# Altium PCB IPS.PcbDoc
Units mm, origin at the board's own origin, x right, y up, seen from the top; angles counter-clockwise.
Board outline 84.33 x 66.8 mm, 2 copper layers (F.Cu, B.Cu); 67 components, 39 nets, 171 pads, 0 vias.
Unrouted connection lines stored in the file: 10.
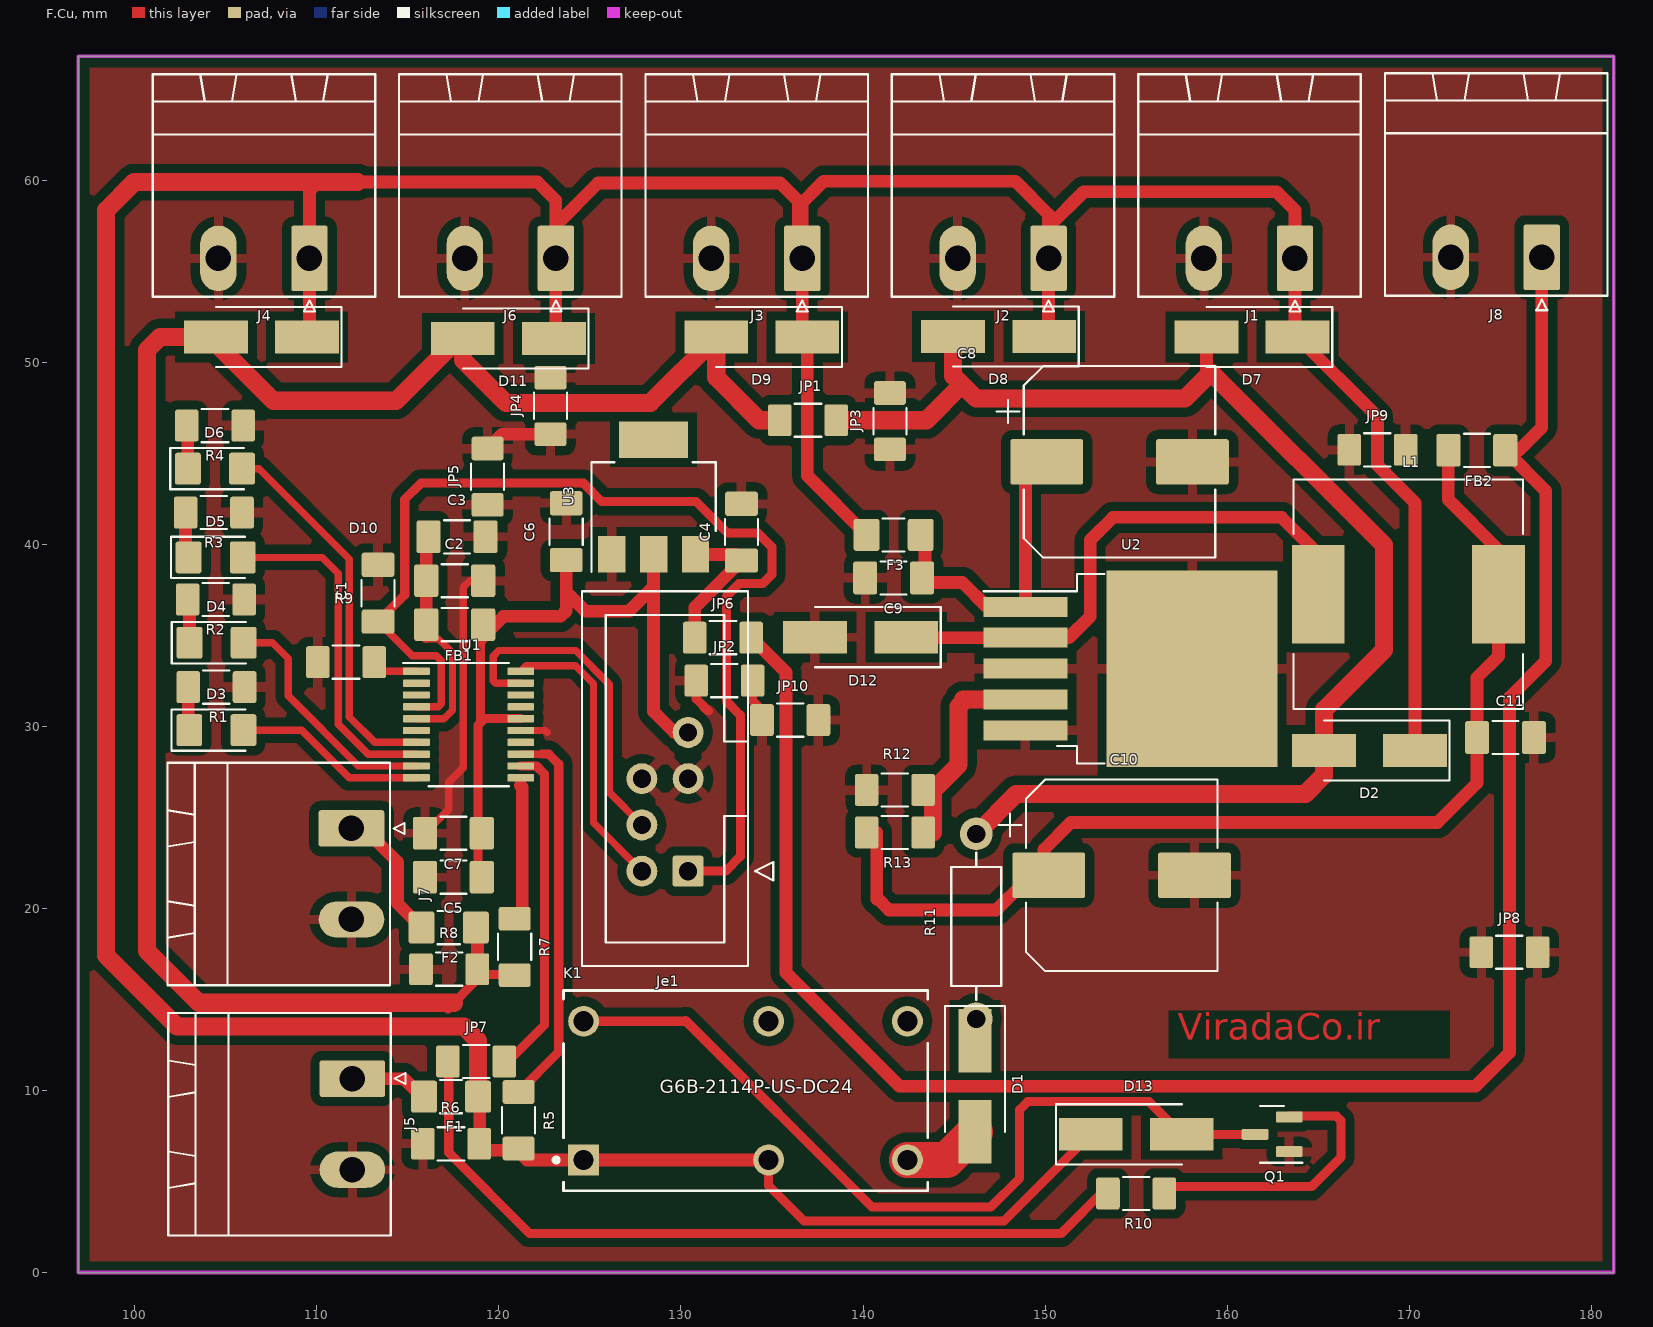
[diagram p0: F.Cu view]
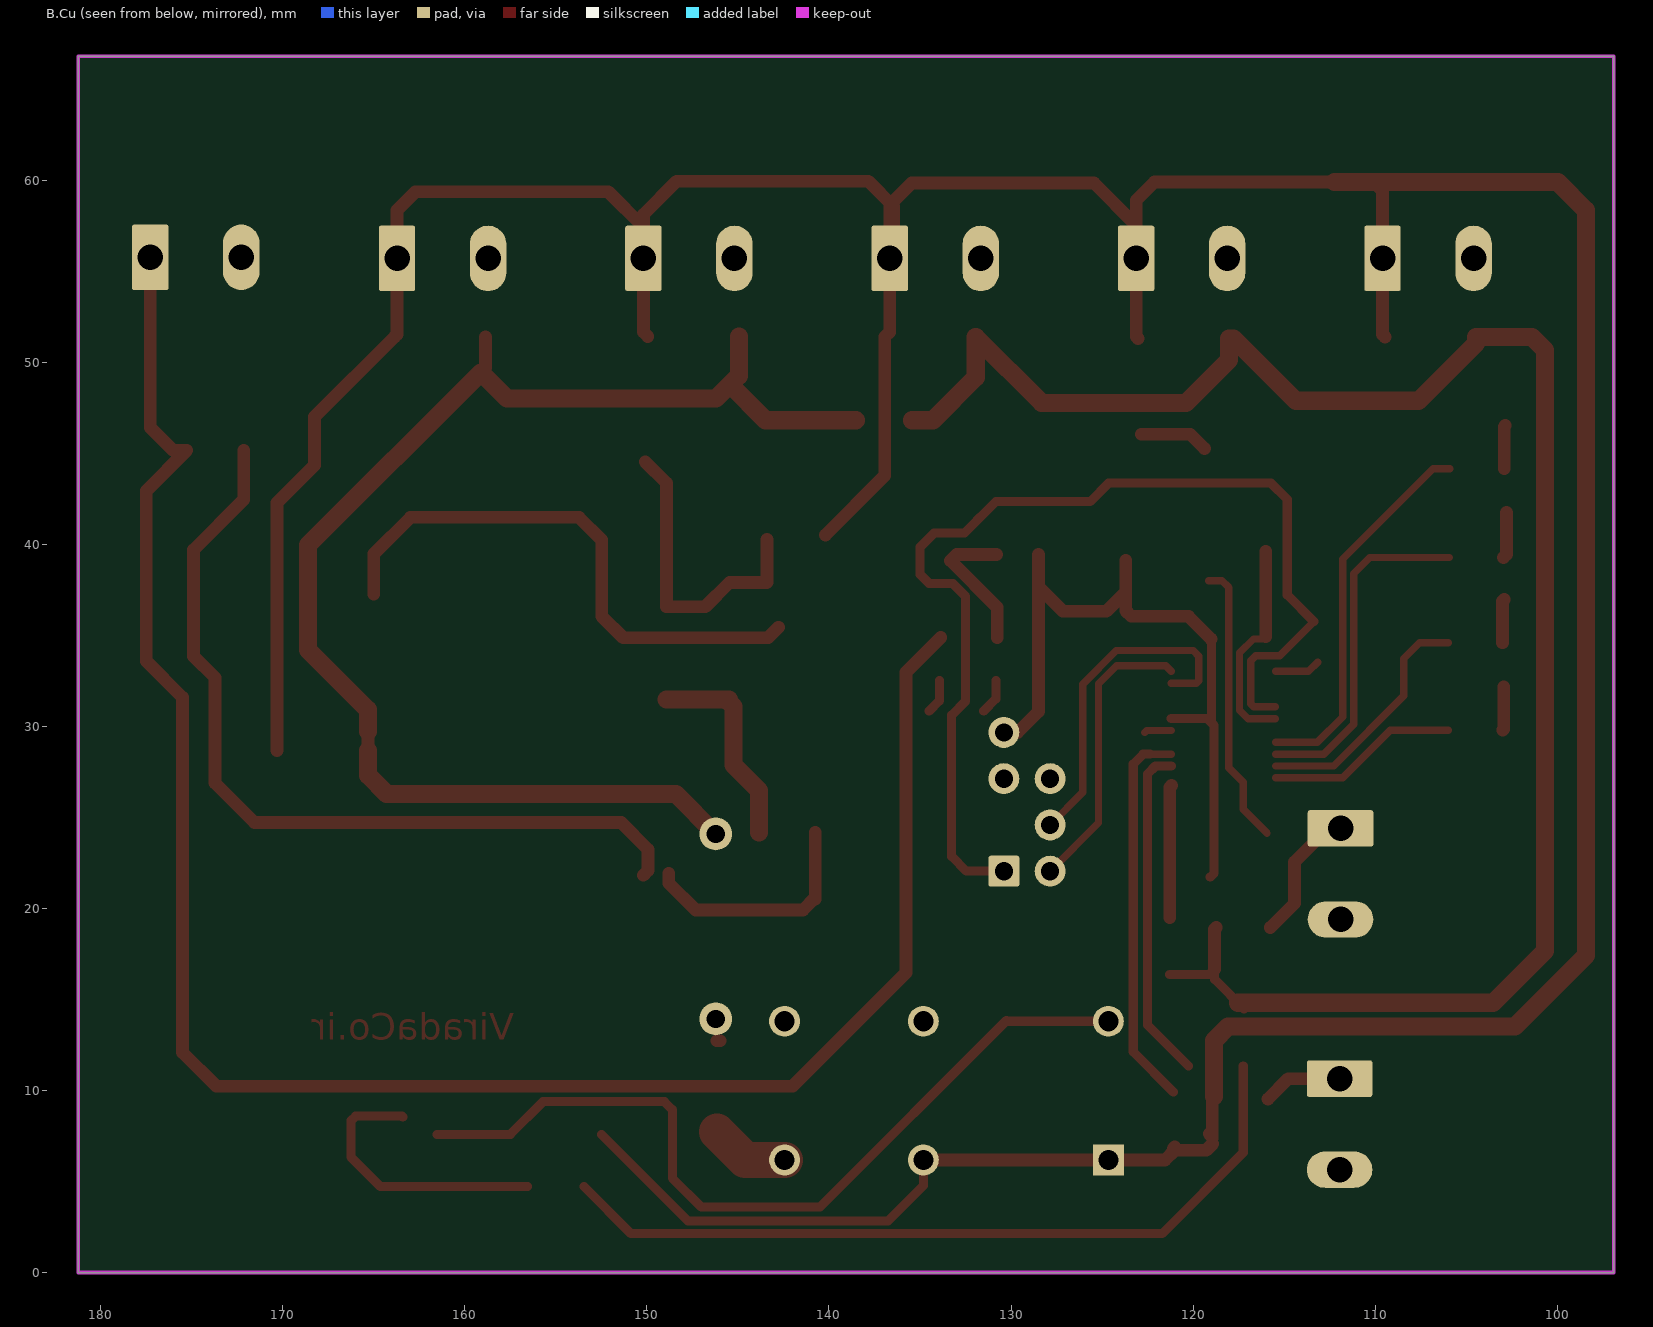
[diagram p1: B.Cu view, seen from below]

## Layer stack, top to bottom
F.Mask: solder mask 0.0102, Solder Resist, Dk 3.5
F.Cu: signal copper 0.0356
Dielectric 1: dielectric 0.32, FR-4, Dk 4.8
B.Cu: signal copper 0.0356
B.Mask: solder mask 0.0102, Solder Resist, Dk 3.5

## Board outline
181.229,66.799 181.229,0 96.901,0 96.901,66.799 181.229,66.799

## Design rules (kind name [scope] priority, off if disabled: settings)
Clearance "Clearence 0.508_Polygon" [InNamedPolygon('F.Cu-GND')] p1: gap=0.508 ignorepadtopadclearanceinfootprint=FALSE
MinimumSolderMaskSliver [All] p1: minsoldermaskwidth=0
PolygonConnect Polygon_F.Cu-GND_ConnectDirect [IsNamedPolygon('F.Cu-GND') vs IsVia] p1: connectstyle=Direct reliefconductorwidth=0.254 reliefentries=4 polygonreliefangle="90 Angle" airgapwidth=0.254
PolygonConnect Polygon_F.Cu-GND_ConnectRelief45 [IsNamedPolygon('F.Cu-GND') vs (IsThruPin or IsSMTPin) and (PadShape_AllLayers = 'Round')] p2: connectstyle=Relief reliefconductorwidth=0.508 reliefentries=4 polygonreliefangle="45 Angle" airgapwidth=0.508
PolygonConnect Polygon_F.Cu-GND_ConnectRelief90 [IsNamedPolygon('F.Cu-GND') vs (IsThruPin or IsSMTPin) and (PadShape_AllLayers <> 'Round')] p3: connectstyle=Relief reliefconductorwidth=0.508 reliefentries=4 polygonreliefangle="90 Angle" airgapwidth=0.508
RoutingVias [All] p1: holewidth=0.711 width=1.27 viastyle="Through Hole" minholewidth=0.711 minwidth=1.27 maxholewidth=0.711 maxwidth=1.27
SilkToSilkClearance [All] p1: silktosilkclearance=0
SilkToSolderMaskClearance [IsPad] p1: minsilkscreentomaskgap=0 clearancetoexposedcopper=TRUE
SolderMaskExpansion [All] p1: expansion=0.102 istentingtop=FALSE
Width [All] p1: maxlimit=10 minlimit=0.254 preferedwidth=0.254 bottomlayer_maxwidth=0.254 minimp=50.000000 maximp=50.000000 favimp=50.000000
27 further rules are at their usual default settings.

## Components (designator, comment, footprint, x,y, rotation, side; value= is the part's Value field where it differs from the comment)
C1 "C_Small" C_1206_3216Metric_Pad1.33x1.80mm_HandSolder 113.36,37.31 r90 top
C2 "C_Small" C_1206_3216Metric_Pad1.33x1.80mm_HandSolder 117.577,37.996 r0 top
C3 "C_Small" C_1206_3216Metric_Pad1.33x1.80mm_HandSolder 117.704,40.409 r0 top
C4 "C_Small" C_1206_3216Metric_Pad1.33x1.80mm_HandSolder 133.325,40.663 r90 top
C5 "C_Small" C_1206_3216Metric_Pad1.33x1.80mm_HandSolder 117.5,21.714 r180 top
C6 "C_Small" C_1206_3216Metric_Pad1.33x1.80mm_HandSolder 123.698,40.688 r90 top
C7 "C_Small" C_1206_3216Metric_Pad1.33x1.80mm_HandSolder 117.5,24.127 r180 top
C8 "CP_Small" CP_Elec_10x10 154.089,44.524 r0 top
C9 "C_Small" C_1206_3216Metric_Pad1.33x1.80mm_HandSolder 141.681,38.148 r180 top
C10 "CP_Small" CP_Elec_10x10 154.203,21.816 r0 top
C11 "C_Small" C_1206_3216Metric_Pad1.33x1.80mm_HandSolder 175.284,29.385 r0 top
D1 "D_Small" D_SMA_Handsoldering 146.152,10.234 r270 top
D2 "D_Small" D_SMA_Handsoldering 167.816,28.674 r180 top
D3 "LED" LED_1206_3216Metric_Pad1.42x1.75mm_HandSolder 104.485,29.792 r0 top
D4 "LED" LED_1206_3216Metric_Pad1.42x1.75mm_HandSolder 104.496,34.592 r0 top
D5 "LED" LED_1206_3216Metric_Pad1.42x1.75mm_HandSolder 104.448,39.277 r0 top
D6 "LED" LED_1206_3216Metric_Pad1.42x1.75mm_HandSolder 104.407,44.153 r0 top
D7 "D_Small" D_SMA_Handsoldering 161.366,51.382 r180 top
D8 "D_Small" D_SMA_Handsoldering 147.447,51.407 r180 top
D9 "D_Small" D_SMA_Handsoldering 134.442,51.382 r180 top
D10 "D_Small" D_SMA_Handsoldering 106.959,51.382 r180 top
D11 "D_Small" D_SMA_Handsoldering 120.523,51.305 r180 top
D12 "D_Small" D_SMA_Handsoldering 139.867,34.897 r180 top
D13 "D_Small" D_SMA_Handsoldering 155,7.592 r0 top
F1 "Fuse_Small" Fuse_1206_3216Metric_Pad1.42x1.75mm_HandSolder 117.373,9.662 r180 top
F2 "Fuse_Small" Fuse_1206_3216Metric_Pad1.42x1.75mm_HandSolder 117.246,18.946 r180 top
F3 "Fuse" Fuse_1206_3216Metric_Pad1.42x1.75mm_HandSolder 141.681,40.51 r180 top
FB1 "FerriteBead_Small" C_1206_3216Metric_Pad1.33x1.80mm_HandSolder 117.577,35.583 r180 top
FB2 "Ferrite_Bead_Small" C_1206_3216Metric_Pad1.33x1.80mm_HandSolder 173.711,45.159 r180 top
J1 "Cam1-12V" PhoenixContact_MSTBA_2,5_2-G_1x02_P5.00mm_Horizontal 163.723,55.7 r180 top
J2 "Cam1-12V" PhoenixContact_MSTBA_2,5_2-G_1x02_P5.00mm_Horizontal 150.192,55.7 r180 top
J3 "Cam1-12V" PhoenixContact_MSTBA_2,5_2-G_1x02_P5.00mm_Horizontal 136.661,55.7 r180 top
J4 "Cam1-12V" PhoenixContact_MSTBA_2,5_2-G_1x02_P5.00mm_Horizontal 109.599,55.7 r180 top
J5 "12VAdaptorIn" PhoenixContact_MSTBA_2,5_2-G_1x02_P5.00mm_Horizontal 111.956,10.651 r270 top
J6 "Cam1-12V" PhoenixContact_MSTBA_2,5_2-G_1x02_P5.00mm_Horizontal 123.13,55.7 r180 top
J7 "12VBatteryIn" PhoenixContact_MSTBA_2,5_2-G_1x02_P5.00mm_Horizontal 111.905,24.392 r270 top
J8 "Modem9V" PhoenixContact_MSTBA_2,5_2-G_1x02_P5.00mm_Horizontal 177.277,55.757 r180 top
Je1 "SWD" IDC-Header_2x05_P2.54mm_Vertical 130.394,22.045 r180 top
JP1 "Jumper_2_Bridged" R_1206_3216Metric_Pad1.30x1.75mm_HandSolder 136.982,46.81 r0 top
JP2 "Jumper_2_Bridged" R_1206_3216Metric_Pad1.30x1.75mm_HandSolder 132.385,32.509 r0 top
JP3 "Jumper_2_Bridged" R_1206_3216Metric_Pad1.30x1.75mm_HandSolder 141.478,46.759 r90 top
JP4 "Jumper_2_Bridged" R_1206_3216Metric_Pad1.30x1.75mm_HandSolder 122.834,47.597 r90 top
JP5 "Jumper_2_Bridged" R_1206_3216Metric_Pad1.30x1.75mm_HandSolder 119.38,43.711 r90 top
JP6 "Jumper_2_Bridged" R_1206_3216Metric_Pad1.30x1.75mm_HandSolder 132.309,34.872 r0 top
JP7 "Jumper_2_Bridged" R_1206_3216Metric_Pad1.30x1.75mm_HandSolder 118.75,11.592 r0 top
JP8 "Jumper_2_Bridged" R_1206_3216Metric_Pad1.30x1.75mm_HandSolder 175.5,17.592 r0 top
JP9 "Jumper_2_Bridged" R_1206_3216Metric_Pad1.30x1.75mm_HandSolder 168.25,45.188 r0 top
JP10 "Jumper_2_Bridged" R_1206_3216Metric_Pad1.30x1.75mm_HandSolder 136,30.342 r0 top
K1 "G6B-2114P-US-DC24" Omron-G6B-2114P-US-DC24-MFG 133.548,9.992 r0 top
L1 "L_Small" L_12x12mm_H6mm 169.95,37.259 r0 top
Q1 "2N2219" SOT-23 162.47,7.592 r180 top
R1 "R_Small" R_1206_3216Metric_Pad1.30x1.75mm_HandSolder 104.485,32.154 r180 top
R2 "R_Small" R_1206_3216Metric_Pad1.30x1.75mm_HandSolder 104.459,36.965 r180 top
R3 "R_Small" R_1206_3216Metric_Pad1.30x1.75mm_HandSolder 104.346,41.74 r180 top
R4 "R_Small" R_1206_3216Metric_Pad1.30x1.75mm_HandSolder 104.407,46.516 r180 top
R5 "R_Small" R_1206_3216Metric_Pad1.30x1.75mm_HandSolder 121.082,8.367 r270 top
R6 "R_Small" R_1206_3216Metric_Pad1.30x1.75mm_HandSolder 117.373,7.071 r0 top
R7 "R_Small" R_1206_3216Metric_Pad1.30x1.75mm_HandSolder 120.868,17.887 r270 top
R8 "R_Small" R_1206_3216Metric_Pad1.30x1.75mm_HandSolder 117.272,16.66 r0 top
R9 "R_Small" R_1206_3216Metric_Pad1.30x1.75mm_HandSolder 111.608,33.525 r0 top
R10 "R_Small" R_1206_3216Metric_Pad1.30x1.75mm_HandSolder 155,4.342 r180 top
R11 "R" R_Axial_DIN0207_L6.3mm_D2.5mm_P10.16mm_Horizontal 146.22,13.932 r90 top
R12 "R_Small" R_1206_3216Metric_Pad1.30x1.75mm_HandSolder 141.75,26.507 r0 top
R13 "R_Small" R_1206_3216Metric_Pad1.30x1.75mm_HandSolder 141.75,24.17 r180 top
U1 "STM32F030F4Px" TSSOP-20_4.4x6.5mm_P0.65mm 118.339,30.096 r0 top
U2 "LM2596T-ADJ" TO-263-5_TabPin3 154.702,33.166 r0 top
U3 "AMS1117-3.3" SOT-223-3_TabPin2 128.499,42.593 r90 top

## Footprints (in the part's own frame and the unit in brackets; to place one, negate y for a bottom-side part, rotate by r counter-clockwise, add the part's x,y. Pads: shape width x height; smd on the part's side, far side on the other; paste and mask are expansions set on the pad)
C_1206_3216Metric_Pad1.33x1.80mm_HandSolder [mm]
  rrect19% 1.325x1.8 smd mask+0: 1(-1.562,0) 2(1.562,0)
  silkscreen extent -0.71,-0.91 0.71,0.91
CP_Elec_10x10 [mm]
  rrect10% 4x2.5 smd mask+0: 1(-4,0) 2(4,0)
  silkscreen extent -6.75,-5.26 5.26,5.26
D_SMA_Handsoldering [mm]
  rect 3.5x1.8 smd mask+0: 1(-2.5,0) 2(2.5,0)
  silkscreen extent -4.4,-1.65 2.5,1.65
Fuse_1206_3216Metric_Pad1.42x1.75mm_HandSolder [mm]
  rrect18% 1.425x1.75 smd mask+0: 1(-1.488,0) 2(1.488,0)
  silkscreen extent -0.6,-0.91 0.6,0.91
IDC-Header_2x05_P2.54mm_Vertical [mm]
  rrect15% 1.7x1.7 hole 1 paste-1.7 mask+0: 1(0,0)
  round 1.7 hole 1 paste-1.7 mask+0: 2(2.54,0) 4(2.54,-2.54) 5(0,-5.08) 6(2.54,-5.08) 7(0,-7.62)
  silkscreen extent -4.68,-15.37 5.83,5.21
L_12x12mm_H6mm [mm]
  rect 2.9x5.4 smd mask+0: 1(-4.95,0) 2(4.95,0)
  silkscreen extent -6.3,-6.3 6.3,6.3
LED_1206_3216Metric_Pad1.42x1.75mm_HandSolder [mm]
  rrect18% 1.425x1.75 smd mask+0: 1(-1.488,0) 2(1.488,0)
  silkscreen extent -2.46,-1.13 1.6,1.13
Omron-G6B-2114P-US-DC24-MFG [mm]
  rect 1.7x1.7 hole 1.1 paste-1.7 mask-1.7: 1(-8.89,-3.81)
  round 1.7 hole 1.1 paste-1.7 mask-1.7: 3(1.27,-3.81) 4(8.89,-3.81) 5(8.89,3.81) 6(1.27,3.81) 8(-8.89,3.81)
  silkscreen extent -10.52,-5.5 10,5.5
PhoenixContact_MSTBA_2,5_2-G_1x02_P5.00mm_Horizontal [mm]
  rrect12% 2x3.6 hole 1.4 paste-3.6 mask+0: 1(0,0)
  rrect100% 2x3.6 hole 1.4 paste-3.6 mask+0: 2(5,0)
  silkscreen extent -3.61,-10.11 8.61,2.91
R_1206_3216Metric_Pad1.30x1.75mm_HandSolder [mm]
  rrect19% 1.3x1.75 smd mask+0: 1(-1.55,0) 2(1.55,0)
  silkscreen extent -0.73,-0.91 0.73,0.91
R_Axial_DIN0207_L6.3mm_D2.5mm_P10.16mm_Horizontal [mm]
  round 1.8 hole 1 paste-1.8 mask+0: 1(0,0)
  rrect100% 1.8x1.8 hole 1 paste-1.8 mask+0: 2(10.16,0)
  silkscreen extent 1.04,-1.37 9.12,1.37
SOT-23 [mm]
  rrect25% 1.475x0.6 smd mask+0: 1(-0.937,0.95) 2(-0.937,-0.95) 3(0.937,0)
  silkscreen extent -1.68,-1.56 0.65,1.56
SOT-223-3_TabPin2 [mm]
  rect 2x1.5 smd mask+0: 1(-3.15,2.3) 2(-3.15,0) 3(-3.15,-2.3)
  rect 2x3.8 smd mask+0: 2(3.15,0)
  silkscreen extent -4.1,-3.41 1.91,3.41
TO-263-5_TabPin3 [mm]
  rect 4.6x1.1 smd mask+0: 1(-5.775,3.4) 2(-5.775,1.7) 3(-5.775,0) 4(-5.775,-1.7) 5(-5.775,-3.4)
  rect 9.4x10.8 smd paste-10.8 mask+0: 3(3.375,0)
  rect 4.55x5.25 on Top Paste mask-5.25: Un1(5.8,-2.775) Un2(0.95,-2.775) Un3(5.8,2.775) Un4(0.95,2.775)
  silkscreen extent -8.08,-5.2 -1.45,5.2
TSSOP-20_4.4x6.5mm_P0.65mm [mm]
  rrect25% 1.475x0.4 smd mask+0: 1(-2.863,2.925) 2(-2.863,2.275) 3(-2.863,1.625) 4(-2.863,0.975) 5(-2.863,0.325) 6(-2.863,-0.325) 7(-2.863,-0.975) 8(-2.863,-1.625) 9(-2.863,-2.275) 10(-2.863,-2.925) 11(2.863,-2.925) 12(2.863,-2.275) 13(2.863,-1.625) 14(2.863,-0.975) 15(2.863,-0.325) 16(2.863,0.325) 17(2.863,0.975) 18(2.863,1.625) 19(2.863,2.275) 20(2.863,2.925)
  silkscreen extent -3.6,-3.38 2.2,3.38

## Part data
C1 C2 C3 C4 C5 C6 C7 C9 C11 FB1 FB2: library part C_1206_3216Metric_Pad1.33x1.80mm_HandSolder, "Capacitor SMD 1206 (3216 Metric), square (rectangular) end terminal, IPC_7351 nominal with elongated pad for handsoldering. (Body size source: IPC-SM-782 page 76, https://www.pcb-3d.com/wordpress/wp-content/uploads/ipc-sm-782a_amendment_1_and_2.pdf), generated with kicad-footprint-generator", Sheetfile=IPS.kicad_sch
C8 C10: library part CP_Elec_10x10, "SMD capacitor, aluminum electrolytic, Nichicon, 10.0x10.0mm", Sheetfile=IPS.kicad_sch
D1 D2 D7 D8 D9 D10 D11 D12 D13: library part D_SMA_Handsoldering, "Diode SMA (DO-214AC) Handsoldering", Sheetfile=IPS.kicad_sch
D3 D4 D5 D6: library part LED_1206_3216Metric_Pad1.42x1.75mm_HandSolder, "LED SMD 1206 (3216 Metric), square (rectangular) end terminal, IPC_7351 nominal, (Body size source: http://www.tortai-tech.com/upload/download/2011102023233369053.pdf), generated with kicad-footprint-generator", Sheetfile=IPS.kicad_sch
F1 F2 F3: library part Fuse_1206_3216Metric_Pad1.42x1.75mm_HandSolder, "Fuse SMD 1206 (3216 Metric), square (rectangular) end terminal, IPC_7351 nominal with elongated pad for handsoldering. (Body size source: http://www.tortai-tech.com/upload/download/2011102023233369053.pdf), generated with kicad-footprint-generator", Sheetfile=IPS.kicad_sch
J1 J2 J3 J4 J5 J6 J7 J8: library part PhoenixContact_MSTBA_2,5_2-G_1x02_P5.00mm_Horizontal, "Generic Phoenix Contact connector footprint for: MSTBA_2,5/2-G; number of pins: 02; pin pitch: 5.00mm; Angled", Sheetfile=IPS.kicad_sch
Je1: library part IDC-Header_2x05_P2.54mm_Vertical, "Through hole IDC box header, 2x05, 2.54mm pitch, DIN 41651 / IEC 60603-13, double rows, https://docs.google.com/spreadsheets/d/16SsEcesNF15N3Lb4niX7dcUr-NY5_MFPQhobNuNppn4/edit#gid=0", Sheetfile=IPS.kicad_sch
JP1 JP2 JP3 JP4 JP5 JP6 JP7 JP8 JP9 JP10 R1 R2 R3 R4 R5 R6 R7 R8 R9 R10 R12 R13: library part R_1206_3216Metric_Pad1.30x1.75mm_HandSolder, "Resistor SMD 1206 (3216 Metric), square (rectangular) end terminal, IPC_7351 nominal with elongated pad for handsoldering. (Body size source: IPC-SM-782 page 72, https://www.pcb-3d.com/wordpress/wp-content/uploads/ipc-sm-782a_amendment_1_and_2.pdf), generated with kicad-footprint-generator", Sheetfile=IPS.kicad_sch
K1: library part Omron-G6B-2114P-US-DC24-MFG, ambient temperature range high=+70°C, ambient temperature range low=-25°C, coil current=12.5mA, coil power=300mW, coil resistance=1920Ω, coil voltage=24V, current rating=5A, digikey part number=Z757-ND, MANUFACTURER=Omron, mouser part number=653-G6B-2114P-DC24, package=PTH_RELAY_20MM0_11MM0, Sheetfile=IPS.kicad_sch, automotive=No, category=Relay, coil type=Non-Latching, device class L1=Electromechanical, device class L2=Relays, device class L3="Power Relays", digikey description="RELAY GEN PURPOSE DPST 5A 24V", height=11mm, lead free=Yes, library id=eb937b87a43738b9, mouser description="General Purpose Relays Power PCB Relay SPST-NO + -NC 24VDC", number of contacts=2, rohs=Yes, switching current=5A, temperature range high=+70°C, temperature range low=-25°C, throw configuration=DPST-NO/NC
L1: library part L_12x12mm_H6mm, "Choke, SMD, 12x12mm 6mm height", Sheetfile=IPS.kicad_sch
Q1: library part SOT-23, "SOT, 3 Pin (https://www.jedec.org/system/files/docs/to-236h.pdf variant AB), generated with kicad-footprint-generator ipc_gullwing_generator.py", Sheetfile=IPS.kicad_sch
R11: library part R_Axial_DIN0207_L6.3mm_D2.5mm_P10.16mm_Horizontal, "Resistor, Axial_DIN0207 series, Axial, Horizontal, pin pitch=10.16mm, 0.25W = 1/4W, length*diameter=6.3*2.5mm^2, http://cdn-reichelt.de/documents/datenblatt/B400/1_4W%23YAG.pdf", Sheetfile=IPS.kicad_sch
U1: library part TSSOP-20_4.4x6.5mm_P0.65mm, "TSSOP, 20 Pin (JEDEC MO-153 Var AC https://www.jedec.org/document_search?search_api_views_fulltext=MO-153), generated with kicad-footprint-generator ipc_gullwing_generator.py", Sheetfile=IPS.kicad_sch
U2: library part TO-263-5_TabPin3, "TO-263 / D2PAK / DDPAK SMD package, http://www.infineon.com/cms/en/product/packages/PG-TO263/PG-TO263-5-1/", Sheetfile=IPS.kicad_sch
U3: library part SOT-223-3_TabPin2, "module CMS SOT223 4 pins", Sheetfile=IPS.kicad_sch

## Nets (pads, with @x,y where several pads share a name; then routed paths per layer and width w, separated by ;. In a path a pad name is that pad's centre, name@x,y a point inside that pad or via, vN(x,y) a via of type N, cw(c..) or ccw(c..) an arc to the next point about the centre after c; other vN are vias at no path point)
12VBattery: D2.2 D7.2 D8.2 D9.2 D10.2 D11.2 F2.1 JP1.1 JP1.2 R7.2 R8.2 R11.2 | length 178.8
  F.Cu w0.5: 117.196,14.475 118.822,16.102 R8.2 119.102,16.38 R7.2@121.285,16.38
  F.Cu w0.7: F2.1 118.822,18.858 R8.2 ; D7.2 158.866,49.691 159.118,49.438 ; D2.2 165.316,29.729
  F.Cu w1: 117.535,14.814 103.527,14.814 100.683,17.659 100.683,50.667 101.397,51.382 D10.2 104.459,51.037 107.62,47.876 114.351,47.876 117.78,51.305 D11.2 118.023,50.122 120.396,47.749 128.31,47.749 D9.2 131.942,49.157 134.29,46.81 JP1.1 ; JP1.2 143.485,46.81 145.44,48.765 ; D8.2 144.947,49.259 145.44,48.765 ; R11.2 148.415,26.286 164.287,26.286 165.316,27.316 D2.2 ; 165.316,29.729 165.316,30.908 168.605,34.197 168.605,39.952 159.118,49.438 157.683,48.003 146.202,48.003 145.44,48.765
12VBatteryUnfused: F2.2 J7.1 | length 7.4
  F.Cu w0.7: J7.1 112.587,24.392 114.427,22.553 114.427,20.278 F2.2
12VInput: D2.1 D7.1 D8.1 D9.1 D10.1 D11.1 D13.1 F1.1 F3.2 J1.1 J2.1 J3.1 J4.1 J6.1 K1.1 K1.3 R5.2 R6.2 | length 261.6
  F.Cu w0.5: K1.3 134.818,4.774 136.75,2.842 147.75,2.842 D13.1
  F.Cu w0.7: D10.1 109.599,51.522 J4.1 109.599,59.406 110.084,59.891 112.243,59.891 122.123,59.891 123.13,58.884 J6.1 ; R6.2 119.276,6.718 121.006,6.718 121.542,6.182 K1.1 K1.3 ; R6.2@118.949,7.388 F1.1@118.949,9.751 ; R6.2@118.949,7.452 R6.2@119.114,7.618 ; R5.2@121.006,6.893 R5.2 ; D11.1 123.13,51.413 J6.1 ; F3.2 136.942,43.762 D9.1 136.661,51.663 J3.1 ; D8.1 150.192,51.652 J2.1 ; D2.1 170.316,42.275 168.25,44.342 168.25,46.998 D7.1 163.723,51.525 J1.1 163.723,58.346 162.712,59.357 152.121,59.357 150.192,57.429 J2.1 ; J6.1 123.13,57.519 125.451,59.84 135.458,59.84 136.661,58.637 J3.1 ; J3.1 136.449,55.912 136.449,58.544 137.846,59.941 148.361,59.941 150.192,58.111 J2.1
  F.Cu w1: 112.243,59.891 99.974,59.891 98.425,58.341 98.425,17.417 102.328,13.514 118.078,13.514 118.861,12.731 F1.1
12VInputSample: R5.1 U1.13 | length 21.2
  F.Cu w0.4: U1.13 122.37,28.471
  F.Cu w0.5: R5.1 123.292,12.127 123.292,27.925 122.745,28.471 122.37,28.471
12VInputUnfused: F1.2 J5.1 | length 4.4
  F.Cu w0.7: J5.1 114.772,10.651 F1.2@115.886,9.537
25%FullLed: D6.2 U1.7 | length 20.9
  F.Cu w0.4: D6.2 106.822,44.153 111.785,39.19 111.785,30.516 113.18,29.121 U1.7
50%FullLed: D5.2 U1.8 | length 18.9
  F.Cu w0.4: D5.2 110.301,39.277 111.186,38.392 111.186,30.112 112.826,28.471 U1.8
75%FullLed: D4.2 U1.9 | length 13.5
  F.Cu w0.4: D4.2 107.569,34.592 108.433,33.729 108.433,31.671 112.282,27.821 U1.9
100%FullLed: D3.2 U1.10 | length 10.6
  F.Cu w0.4: D3.2 109.169,29.792 111.789,27.171 U1.10
+3.3VA: C2.1 C3.1 FB1.2 U1.5 | length 11.6
  F.Cu w0.4: U1.5 116.987,30.421 117.45,30.884 117.45,34.033 116.688,34.795 FB1.2@116.205,34.795
  F.Cu w0.7: FB1.2@116.014,34.922 C3.1@116.014,39.621
+3V3: C5.1 C6.1 C7.1 FB1.1 Je1.7 U1.16 U3.2 | length 42.4
  F.Cu w0.5: FB1.1@119.012,34.795 118.999,34.782 118.999,30.198 118.847,30.046 ; C5.1 118.847,21.93 118.847,30.046 ; U1.16 119.222,30.421 118.847,30.046
  F.Cu w0.7: FB1.1@119.012,34.795 120.257,36.04 123.393,36.04 123.698,36.345 C6.1 123.698,37.386 124.765,36.319 127.152,36.319 128.499,37.666 ; U3.2@128.499,39.443 128.499,37.666 ; Je1.7 129.642,29.665 128.499,30.808 128.499,37.666
+9V: C4.1 FB2.1 J8.1 JP6.1 JP6.2 U3.3 | length 116.9
  F.Cu w0.7: JP6.1 130.759,36.534 C4.1 132.982,39.443 U3.3 ; JP6.2 135.763,32.967 135.763,16.468 142.001,10.231 173.639,10.231 175.5,12.092 175.5,31.592 177.5,33.592 177.5,42.932 FB2.1 176.022,45.159 177.277,46.414 J8.1
BatterySample: R7.1 U1.11 | length 7.3
  F.Cu w0.7: 121.183,26.744 121.285,26.642 R7.1@121.285,19.48
ChargerRelay: JP7.1 JP7.2 R10.2 U1.12 | length 62.3
  F.Cu w0.5: JP7.1@117.25,11.342 117.25,6.592 121.7,2.142 150.871,2.142 R10.2@153.45,4.721 ; JP7.2@120.25,11.342 122.5,13.592 122.5,27.387 122.066,27.821 U1.12
GND: C1.2 C2.2 C3.2 C4.2 C5.2 C6.2 C7.2 C8.2 C9.2 C10.2 C11.2 D12.2 J1.2 J2.2 J3.2 J4.2 J5.2 J6.2 J7.2 J8.2 Je1.5 Je1.6 JP2.1 JP2.2 JP3.1 JP3.2 JP4.1 JP4.2 JP5.1 JP5.2 JP8.1 JP8.2 JP9.1 JP9.2 JP10.1 JP10.2 Q1.1 R1.1 R2.1 R3.1 R4.1 R6.1 R8.1 R9.1 R12.1 U1.15 U2.3 U2.5 U3.1 | length 24.7
  F.Cu w0.4: C7.2 117.25,25.44 117.25,26.925 118.049,27.724 118.049,37.63 118.415,37.996 C2.2 ; U1.15 122.55,29.771 122.657,29.665
  F.Cu w0.5: JP2.1 130.835,31.507 131.5,30.842 ; JP2.2 133.935,31.407 JP10.1@134.5,30.842
  F.Cu w0.7: JP5.2 120.166,46.047 JP4.1
Net-(C8-Pad1): C8.1 C9.1 F3.1 U2.1 | length 16.9
  F.Cu w0.7: C9.1@143.409,37.907 F3.1@143.409,40.256 ; C9.1@143.413,37.904 145.456,37.904 146.794,36.566 U2.1 148.927,43.362 C8.1
Net-(C10-Pad1): C10.1 C11.1 FB2.2 L1.2 R13.2 | length 59.9
  F.Cu w0.7: 140.75,20.513 R13.2@140.75,24.17 ; 140.75,20.592 141.431,19.911 147.319,19.911 148.805,21.397 C10.1@148.805,21.918 ; C10.1 149.936,22.083 149.936,23.238 151.409,24.712 171.552,24.712 173.722,26.882 C11.1 173.722,32.673 174.9,33.851 L1.2 174.9,39.692 172.148,42.444 FB2.2
Net-(D1-Pad1): D1.1 R11.1 | length 0.2
  F.Cu w0.7: D1.1@145.985,12.734 D1.1
Net-(D1-Pad2): D1.2 K1.4 | length 4.4
  F.Cu w2: K1.4 144.6,6.182 D1.2
Net-(D3-Pad1): D3.1 R1.2 | length 2.4
  F.Cu w0.7: R1.2 102.935,29.854 D3.1
Net-(D4-Pad1): D4.1 R2.2 | length 2.4
  F.Cu w0.7: R2.2 103.008,36.867 D4.1
Net-(D5-Pad1): D5.1 R3.2 | length 2.5
  F.Cu w0.7: R3.2 102.796,39.441 D5.1
Net-(D6-Pad1): D6.1 R4.2 | length 2.4
  F.Cu w0.7: R4.2 102.92,46.453 D6.1
Net-(D12-Pad1): D12.1 L1.1 U2.2 | length 30.7
  F.Cu w0.7: D12.1@142.773,35.441 143.349,34.866 U2.2 151.302,34.866 152.476,36.04 152.476,40.231 153.721,41.476 162.992,41.476 165,39.467 L1.1
Net-(D13-Pad2): D13.2 K1.8 Q1.3 | length 46.4
  F.Cu w0.5: K1.8 130.211,13.802 ; 130.25,13.842 140.5,3.592 147,3.592 148.598,5.19 148.598,8.94 149.043,9.385 155.707,9.385 D13.2 Q1.3
Net-(Q1-Pad2): Q1.2 R10.1 | length 15.3
  F.Cu w0.5: R10.1@156.55,4.721 164.629,4.721 166.25,6.342 166.25,8.342 166,8.592 163.457,8.592 Q1.2
Net-(R9-Pad2): R9.2 U1.1 | length 2.5
  F.Cu w0.4: R9.2 113.662,33.021 U1.1
Net-(R12-Pad2): R12.2 R13.1 U2.4 | length 11.3
  F.Cu w1: R13.1@143.85,24.17 143.85,26.482 145.25,27.882 145.25,31.092 145.5,31.342 ; 145.489,31.466 U2.4
STM32NRST: C1.1 Je1.1 U1.4 | length 60
  F.Cu w0.4: C1.1 113.373,35.748 115.24,33.881 116.561,33.881 116.84,33.602 116.84,31.239 116.672,31.071 U1.4
  F.Cu w0.5: C1.1 114.833,37.221 114.833,42.466 115.73,43.363 124.638,43.363 125.659,42.342 130.833,42.342 132.563,40.612 134.23,40.612 135,39.842 135,38.342 134.5,37.842 133.197,37.842 132.5,37.145 132.5,31.379 133.262,30.618 133.262,22.853 132.453,22.045 Je1.1 ; 131.724,41.476 131.877,41.323
STM32SCIN: U1.2
STM32SCOUT: U1.3
SWCLK: Je1.2 U1.20 | length 15.9
  F.Cu w0.4: U1.20 121.502,33.322 124.206,33.322 125.197,32.332 125.197,24.702 Je1.2
SWDIO: Je1.4 U1.19 | length 18.7
  F.Cu w0.4: U1.19 119.823,32.371 119.685,32.509 119.685,33.845 120,34.16 124.216,34.16 126.057,32.319 126.057,26.381 Je1.4
unconnected-(K1-Pad5): K1.5
unconnected-(K1-Pad6): K1.6
unconnected-(U1-Pad6): U1.6
unconnected-(U1-Pad14): U1.14
unconnected-(U1-Pad17): U1.17
unconnected-(U1-Pad18): U1.18
pads on no net: U2.Un1 U2.Un2 U2.Un3 U2.Un4

## Polygon pours and split planes (outlines as drawn)
GND on F.Cu "F.Cu-GND" (solid, remove dead copper, pour order 0): 181.026,0.004 97.028,0.004 97.028,66.876 181.026,66.876

## Keep-outs
Edge.Cuts:
  lines w0.2: 96.901,0 96.901,66.799 ; 96.901,0 181.229,0 ; 96.901,0 96.901,66.799 ; 96.901,0 181.229,0 ; 96.901,66.799 181.229,66.799 ; 96.901,66.799 181.229,66.799 ; 181.229,0 181.229,66.799 ; 181.229,0 181.229,66.799

## Other copper
F.Cu:
  text "ViradaCo.ir" at 157.288,12.298 h2.5